# Altium PCB ILI2511_FPC_TX41RX23_20170830.PcbDoc
Units mm, origin at the board's own origin, x right, y up, seen from the top; angles counter-clockwise.
Board outline 60.1 x 74 mm, 2 copper layers (Top Layer, Bottom Layer); 3 components, 83 nets, 145 pads, 205 vias.
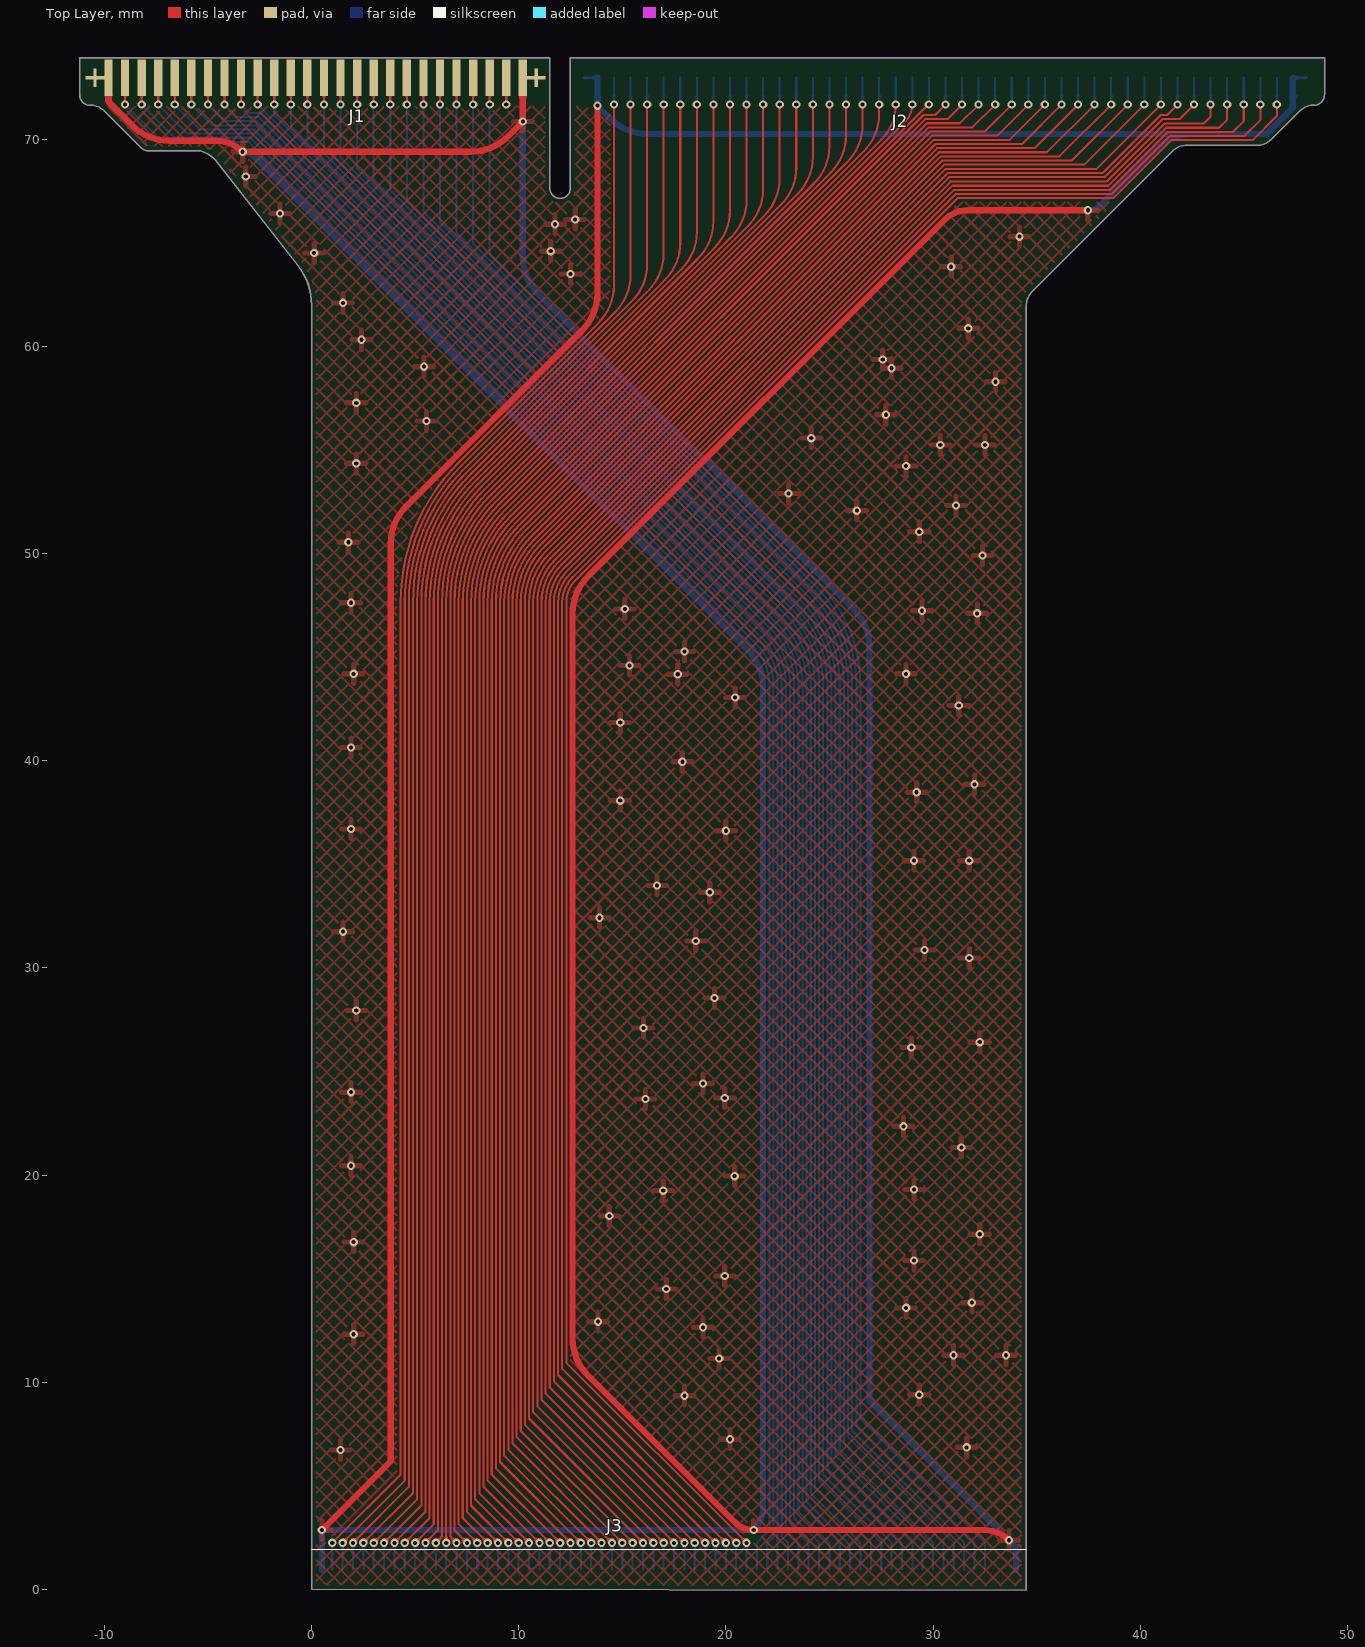
[diagram p0: Top Layer view]
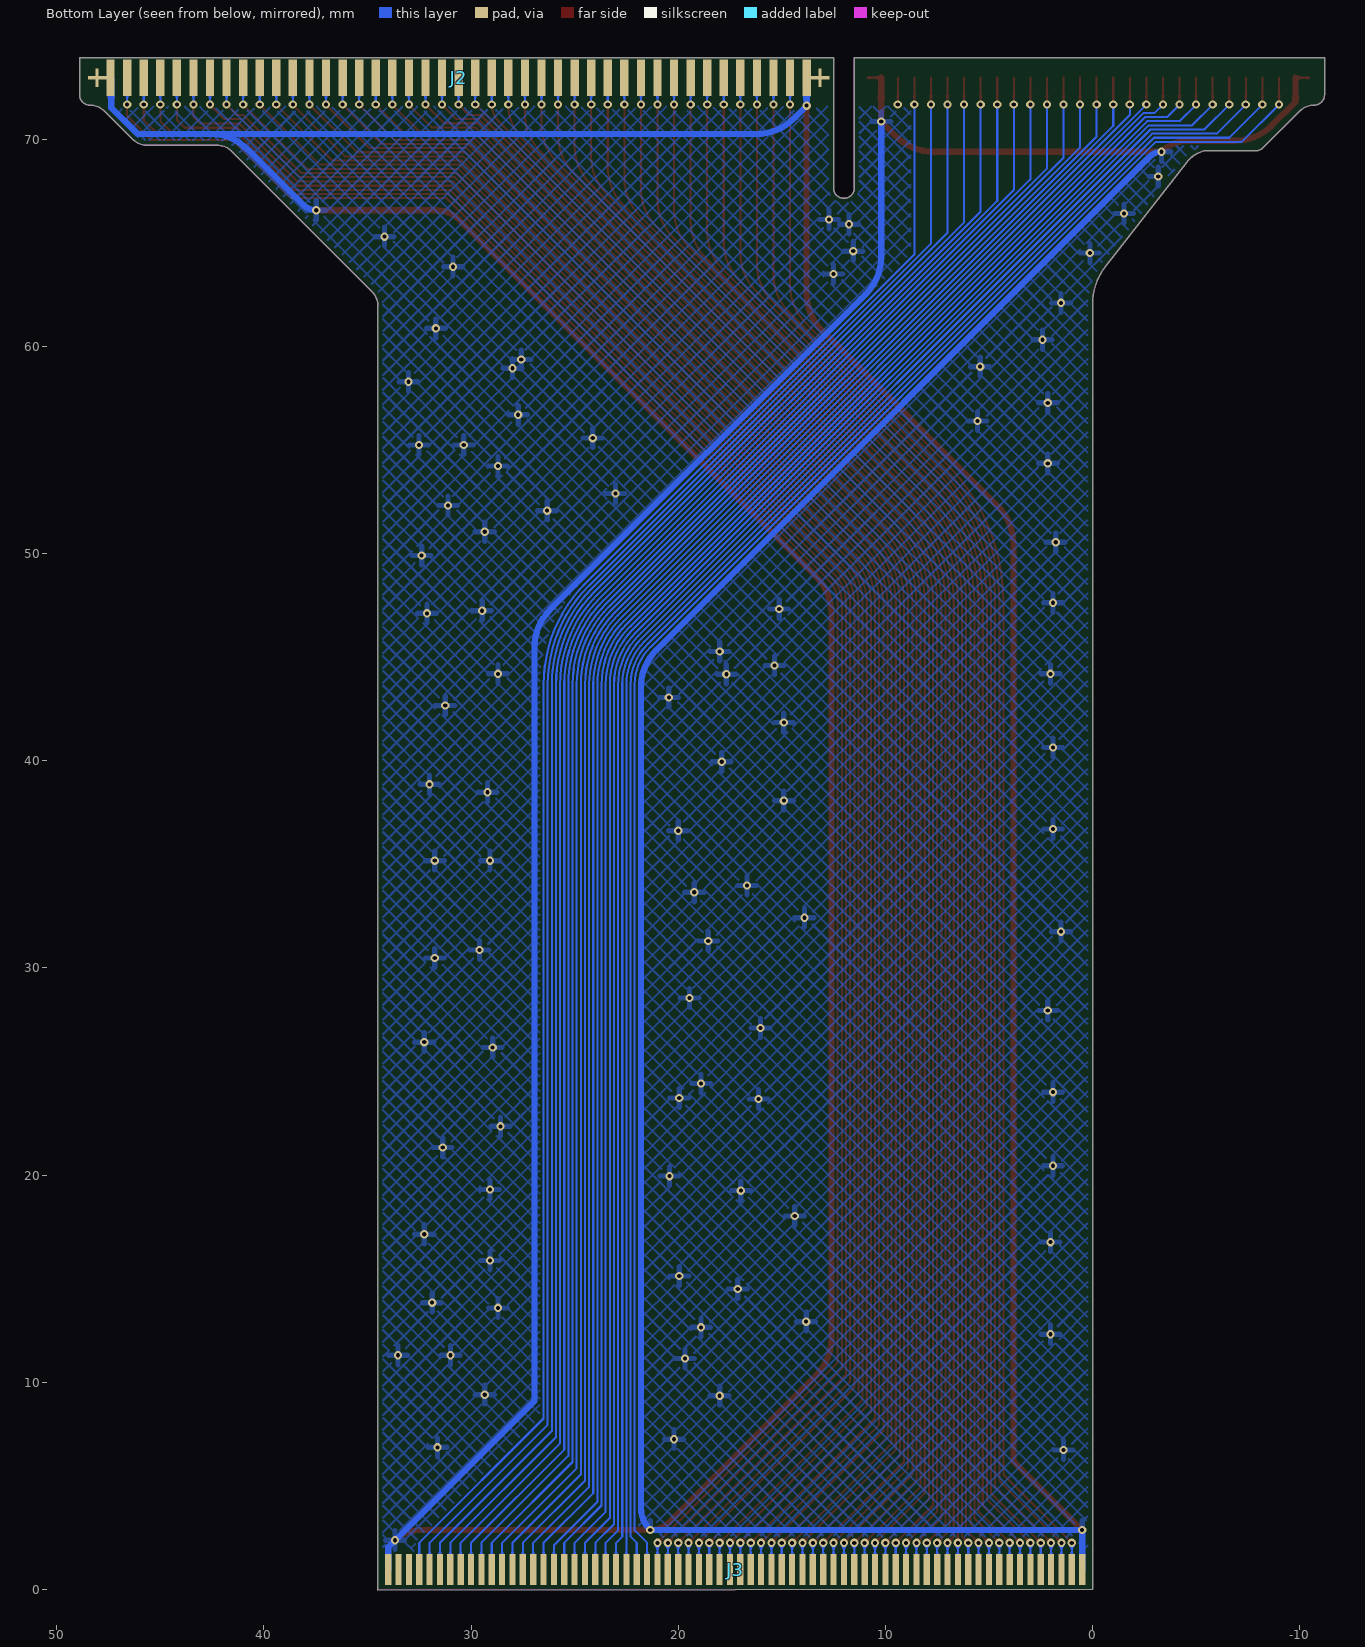
[diagram p1: Bottom Layer view, seen from below]

## Layer stack, top to bottom
Top Solder: solder mask 0.0102, Solder Resist, Dk 3.5
Top Layer: signal copper 0.0356
Dielectric 1: dielectric 0.32, FR-4, Dk 4.8
Bottom Layer: signal copper 0.0356
Bottom Solder: solder mask 0.0102, Solder Resist, Dk 3.5

## Board outline
0,0 0,62 ccw(c-3.1,62) -0.657,63.909 -4.547,68.888 ccw(c-5.762,67.967) -5.372,69.44 -7.872,69.44 cw(c-7.872,69.94) -8.225,69.587 -9.993,71.355 ccw(c-10.7,70.647) -10.7,71.647 cw(c-10.7,72.147) -11.2,72.147 -11.2,73.947 11.5,73.947 11.5,67.647 ccw(c12,67.647) 12.5,67.647 12.5,73.947 48.9,73.947 48.9,72.147 cw(c48.4,72.147) 48.4,71.647 ccw(c48.4,70.647) 47.693,71.355 46.339,70.001 cw(c45.632,70.708) 45.632,69.708 42.229,69.708 ccw(c42.229,68.784) 41.576,69.437 34.793,62.655 ccw(c35.5,61.947) 34.5,61.947 34.5,-0.053

## Design rules (kind name [scope] priority, off if disabled: settings)
Clearance Clearance_1 [InNetClass('All Nets') vs InNetClass('All Nets')] p1: gap=0.1
Clearance [OnLayer('Keep-Out Layer')] p2: gap=0.2 except(0: Arc-SMDPad Track-SMDPad)
MinimumSolderMaskSliver [All] p1: minsoldermaskwidth=0.1
PolygonConnect [All] p1: connectstyle=Relief reliefconductorwidth=0.254 reliefentries=4 polygonreliefangle="90 Angle" airgapwidth=0.254
RoutingVias [All] p1: holewidth=0.2 width=0.4 viastyle="Through Hole" minholewidth=0.2 minwidth=0.4 maxholewidth=0.711 maxwidth=1.27
SilkToSolderMaskClearance [IsPad] p1: minsilkscreentomaskgap=0 clearancetoexposedcopper=TRUE
SolderMaskExpansion [All] p1: expansion=0.102
Width [All] p1: maxlimit=0.5 minlimit=0.1 preferedwidth=0.1
28 further rules are at their usual default settings.

## Components (designator, comment, footprint, x,y, rotation, side; value= is the part's Value field where it differs from the comment)
J1 "CON-26PIN" CON_26PIN -10,72.097 r0 top
J2 "CON_43PIN" CON_43PIN 13.6,72.097 r0 top locked
J3 "CON_68PIN" CON-68PIN 0.35,0.2 r0 top locked

## Footprints (in the part's own frame and the unit in brackets; to place one, negate y for a bottom-side part, rotate by r counter-clockwise, add the part's x,y. Pads: shape width x height; smd on the part's side, far side on the other; paste and mask are expansions set on the pad)
CON-68PIN [mm]
  rect 0.3x1.5 smd far side: 1(0.15,0.75) 2(0.65,0.75) 3(1.15,0.75) 4(1.65,0.75) 5(2.15,0.75) 6(2.65,0.75) 7(3.15,0.75) 8(3.65,0.75) 9(4.15,0.75) 10(4.65,0.75) 11(5.15,0.75) 12(5.65,0.75) 13(6.15,0.75) 14(6.65,0.75) 15(7.15,0.75) 16(7.65,0.75) 17(8.15,0.75) 18(8.65,0.75) 19(9.15,0.75) 20(9.65,0.75) 21(10.15,0.75) 22(10.65,0.75) 23(11.15,0.75) 24(11.65,0.75) 25(12.15,0.75) 26(12.65,0.75) 27(13.15,0.75) 28(13.65,0.75) 29(14.15,0.75) 30(14.65,0.75) 31(15.15,0.75) 32(15.65,0.75) 33(16.15,0.75) 34(16.65,0.75) 35(17.15,0.75) 36(17.65,0.75) 37(18.15,0.75) 38(18.65,0.75) 39(19.15,0.75) 40(19.65,0.75) 41(20.15,0.75) 42(20.65,0.75) 43(21.15,0.75) 44(21.65,0.75) 45(22.15,0.75) 46(22.65,0.75) 47(23.15,0.75) 48(23.65,0.75) 49(24.15,0.75) 50(24.65,0.75) 51(25.15,0.75) 52(25.65,0.75) 53(26.15,0.75) 54(26.65,0.75) 55(27.15,0.75) 56(27.65,0.75) 57(28.15,0.75) 58(28.65,0.75) 59(29.15,0.75) 60(29.65,0.75) 61(30.15,0.75) 62(30.65,0.75) 63(31.15,0.75) 64(31.65,0.75) 65(32.15,0.75) 66(32.65,0.75) 67(33.15,0.75) 68(33.65,0.75)
CON_26PIN [mm]
  rect 0.4x1.75 smd: 1(0.2,0.875) 2(1,0.875) 3(1.8,0.875) 4(2.6,0.875) 5(3.4,0.875) 6(4.2,0.875) 7(5,0.875) 8(5.8,0.875) 9(6.6,0.875) 10(7.4,0.875) 11(8.2,0.875) 12(9,0.875) 13(9.8,0.875) 14(10.6,0.875) 15(11.4,0.875) 16(12.2,0.875) 17(13,0.875) 18(13.8,0.875) 19(14.6,0.875) 20(15.4,0.875) 21(16.2,0.875) 22(17,0.875) 23(17.8,0.875) 24(18.6,0.875) 25(19.4,0.875) 26(20.2,0.875)
CON_43PIN [mm]
  rect 0.4x1.75 smd far side: 1(0.2,0.875) 2(1,0.875) 3(1.8,0.875) 4(2.6,0.875) 5(3.4,0.875) 6(4.2,0.875) 7(5,0.875) 8(5.8,0.875) 9(6.6,0.875) 10(7.4,0.875) 11(8.2,0.875) 12(9,0.875) 13(9.8,0.875) 14(10.6,0.875) 15(11.4,0.875) 16(12.2,0.875) 17(13,0.875) 18(13.8,0.875) 19(14.6,0.875) 20(15.4,0.875) 21(16.2,0.875) 22(17,0.875) 23(17.8,0.875) 24(18.6,0.875) 25(19.4,0.875) 26(20.2,0.875) 27(21,0.875) 28(21.8,0.875) 29(22.6,0.875) 30(23.4,0.875) 31(24.2,0.875) 32(25,0.875) 33(25.8,0.875) 34(26.6,0.875) 35(27.4,0.875) 36(28.2,0.875) 37(29,0.875) 38(29.8,0.875) 39(30.6,0.875) 40(31.4,0.875) 41(32.2,0.875) 42(33,0.875) 43(33.8,0.875)

## Free pads (board coordinates)
  rect 0.9x0.15 smd: 0(-10.45,72.972) 3(10.85,72.972)
  rect 0.15x0.9 smd: 0(-10.45,72.972) 2(10.85,72.972)
  rect 0.9x0.15 smd far side: 4(13.15,72.972) 6(48.05,72.972)
  rect 0.15x0.9 smd far side: 5(13.15,72.972) 7(48.05,72.972)

## Via types
v1: diameter 0.4, hole 0.2, Top Layer to Bottom Layer, tented both sides, 205 vias

## Nets (pads, with @x,y where several pads share a name; then routed paths per layer and width w, separated by ;. In a path a pad name is that pad's centre, name@x,y a point inside that pad or via, vN(x,y) a via of type N, cw(c..) or ccw(c..) an arc to the next point about the centre after c; other vN are vias at no path point)
ESD_DUMMY: J1.1 J1.26 J2.1 J2.43 J3.1 J3.68 pad.0 pad.2 pad.3 pad.4 pad.5 pad.6 pad.7 | length 418.9
  Top Layer w0.1: pad.0@-10.45,72.972 J1.1 ; J1.26 pad.2
  Top Layer w0.3: J1.1 -9.8,71.811 -8.657,70.669 ccw(c-6.861,72.465) -6.861,69.925 -4.592,69.925 cw(c-4.592,68.133) v1(-3.325,69.4) 7.691,69.4 ccw(c7.691,71.94) 9.487,70.144 v1(10.2,70.856) J1.26 ; v1(0.5,2.863) 3.821,6.184 3.821,50.482 cw(c6.361,50.482) 4.565,52.278 13.056,60.769 ccw(c11.26,62.565) 13.8,62.565 v1(13.8,71.625) ; v1(33.666,2.374) ccw(c32.485,1.194) 32.485,2.863 v1(21.35,2.863) cw(c21.35,4.171) 20.425,3.246 13.344,10.328 cw(c15.14,12.124) 12.6,12.124 12.6,47.099 cw(c15.14,47.099) 13.344,48.895 30.564,66.114 cw(c31.676,65.003) 31.676,66.575 v1(37.475,66.575)
  Bottom Layer w0.1: pad.4 J2.1 ; J2.43 pad.6
  Bottom Layer w0.3: v1(-3.325,69.4) cw(c-3.325,68.614) -2.769,69.17 21.056,45.345 cw(c19.26,43.549) 21.8,43.549 21.8,3.951 cw(c20.263,3.951) v1(21.35,2.863) v1(0.5,2.863) J3.1 ; v1(10.2,70.856) 10.2,64.324 ccw(c12.74,64.324) 10.944,62.528 26.191,47.281 cw(c24.395,45.485) 26.935,45.485 26.935,9.105 v1(33.666,2.374) 34,2.041 J3.68 ; J2.1 v1(13.8,71.625) 14.423,71.002 ccw(c16.219,72.798) 16.219,70.258 42.577,70.258 ; v1(37.475,66.575) ccw(c37.475,67.461) 38.102,66.835 40.781,69.514 cw(c42.577,67.718) 42.577,70.258 ; 43.125,70.258 42.577,70.258 ; J2.43 47.363,72.935 47.363,71.52 46.174,70.331 46.164,70.331 46.091,70.258 42.577,70.258
  other v1: 1.397,6.731 31.623,6.858 20.2,7.25 18,9.35 29.337,9.398 19.675,11.15 30.988,11.303 33.528,11.303 2.032,12.319 18.9,12.65 13.825,12.925 28.702,13.589 31.877,13.843 17.125,14.5 19.95,15.125 29.083,15.875 2.032,16.764 32.258,17.145 14.375,18.025 16.975,19.25 29.083,19.304 20.425,19.95 1.905,20.447 31.369,21.336 28.575,22.352 16.125,23.675 19.95,23.725 1.905,24.003 18.9,24.425 28.956,26.162 32.258,26.416 16.025,27.1 2.159,27.94 19.45,28.55 31.75,30.48 29.591,30.861 18.55,31.3 1.524,31.75 13.9,32.425 19.225,33.65 16.675,33.975 29.083,35.179 31.75,35.179 20,36.625 1.905,36.703 14.9,38.075 29.21,38.481 32.004,38.862 17.9,39.95 1.905,40.64 14.9,41.85 31.242,42.672 20.45,43.05 17.675,44.175 2.032,44.196 28.702,44.196 15.35,44.6 18,45.275 32.131,47.117 29.464,47.244 15.125,47.325 1.905,47.625 32.385,49.911 1.778,50.546 29.337,51.054 26.325,52.075 31.115,52.324 23.025,52.9 28.702,54.229 2.159,54.356 30.353,55.245 32.512,55.245 24.125,55.575 5.55,56.4 27.725,56.7 2.159,57.277 33.02,58.293 28,58.95 5.425,59.025 27.575,59.375 2.413,60.325 31.7,60.875 1.524,62.103 12.5,63.5 30.875,63.85 0.127,64.516 11.55,64.6 34.175,65.3 11.75,65.9 12.725,66.125 -1.524,66.421 -3.175,68.199
RX1: J1.2 J3.43 | length 87.5
  Top Layer w0.1: v1(-9,71.675) J1.2
  Bottom Layer w0.1: v1(-9,71.675) -7.2,69.875 -3.05,69.875 21.356,45.469 cw(c19.56,43.673) 22.1,43.673 22.1,2.847 21.5,2.247 J3.43
RX2: J1.3 J3.44 | length 86.8
  Top Layer w0.1: v1(-8.2,71.675) J1.3
  Bottom Layer w0.1: v1(-8.2,71.675) -6.6,70.075 -2.967,70.075 21.497,45.61 cw(c19.56,43.673) 22.3,43.673 22.3,2.547 22,2.247 J3.44
RX3: J1.4 J3.45 | length 86.1
  Top Layer w0.1: v1(-7.4,71.675) J1.4
  Bottom Layer w0.1: v1(-7.4,71.675) -6,70.275 -2.884,70.275 21.639,45.752 cw(c19.56,43.673) 22.5,43.673 J3.45
RX4: J1.5 J3.46 | length 85.7
  Top Layer w0.1: v1(-6.6,71.675) J1.5
  Bottom Layer w0.1: v1(-6.6,71.675) -5.4,70.475 -2.801,70.475 21.78,45.893 cw(c19.56,43.673) 22.7,43.673 22.7,2.547 23,2.247 J3.46
RX5: J1.6 J3.47 | length 85.2
  Top Layer w0.1: v1(-5.8,71.675) J1.6
  Bottom Layer w0.1: v1(-5.8,71.675) -4.8,70.675 -2.719,70.675 21.922,46.035 cw(c19.56,43.673) 22.9,43.673 22.9,2.847 23.5,2.247 J3.47
RX6: J1.7 J3.48 | length 84.8
  Top Layer w0.1: v1(-5,71.675) J1.7
  Bottom Layer w0.1: v1(-5,71.675) -4.2,70.875 -2.636,70.875 22.063,46.176 cw(c19.56,43.673) 23.1,43.673 23.1,3.147 24,2.247 J3.48
RX7: J1.8 J3.49 | length 84.4
  Top Layer w0.1: v1(-4.2,71.675) J1.8
  Bottom Layer w0.1: v1(-4.2,71.675) -3.6,71.075 -2.553,71.075 22.205,46.318 cw(c19.56,43.673) 23.3,43.673 23.3,3.447 24.5,2.247 J3.49
RX8: J1.9 J3.50 | length 83.9
  Top Layer w0.1: v1(-3.4,71.675) J1.9
  Bottom Layer w0.1: v1(-3.4,71.675) -3,71.275 -2.47,71.275 22.346,46.459 cw(c19.56,43.673) 23.5,43.673 23.5,3.747 25,2.247 J3.50
RX9: J1.10 J3.51 | length 83.5
  Top Layer w0.1: v1(-2.6,71.675) J1.10
  Bottom Layer w0.1: v1(-2.6,71.675) -2.587,71.675 22.487,46.6 cw(c19.56,43.673) 23.7,43.673 23.7,4.047 25.5,2.247 J3.51
RX10: J1.11 J3.52 | length 83.4
  Top Layer w0.1: v1(-1.8,71.675) J1.11
  Bottom Layer w0.1: v1(-1.8,71.675) -1.8,71.171 22.629,46.742 cw(c19.56,43.673) 23.9,43.673 23.9,4.22 26,2.12 J3.52
RX11: J1.12 J3.53 | length 83.2
  Top Layer w0.1: v1(-1,71.675) J1.12
  Bottom Layer w0.1: v1(-1,71.675) -1,70.653 22.77,46.883 cw(c19.56,43.673) 24.1,43.673 24.1,4.647 26.5,2.247 J3.53
RX12: J1.13 J3.54 | length 83.1
  Top Layer w0.1: v1(-0.2,71.675) J1.13
  Bottom Layer w0.1: v1(-0.2,71.675) -0.2,70.136 22.912,47.025 cw(c19.56,43.673) 24.3,43.673 24.3,4.947 27,2.247 J3.54
RX13: J1.14 J3.55 | length 83
  Top Layer w0.1: v1(0.6,71.675) J1.14
  Bottom Layer w0.1: v1(0.6,71.675) 0.6,69.619 23.053,47.166 cw(c19.56,43.673) 24.5,43.673 24.5,5.247 27.5,2.247 J3.55
RX14: J1.15 J3.56 | length 82.8
  Top Layer w0.1: v1(1.4,71.675) J1.15
  Bottom Layer w0.1: v1(1.4,71.675) 1.4,69.102 23.194,47.307 cw(c19.56,43.673) 24.7,43.673 24.7,5.547 28,2.247 J3.56
RX15: J1.16 J3.57 | length 82.7
  Top Layer w0.1: v1(2.2,71.675) J1.16
  Bottom Layer w0.1: v1(2.2,71.675) 2.2,68.585 23.336,47.449 cw(c19.56,43.673) 24.9,43.673 24.9,5.847 28.5,2.247 J3.57
RX16: J1.17 J3.58 | length 82.6
  Top Layer w0.1: v1(3,71.675) J1.17
  Bottom Layer w0.1: v1(3,71.675) 3,68.068 23.477,47.59 cw(c19.56,43.673) 25.1,43.673 25.1,6.147 29,2.247 J3.58
RX17: J1.18 J3.59 | length 82.4
  Top Layer w0.1: v1(3.8,71.675) J1.18
  Bottom Layer w0.1: v1(3.8,71.675) 3.8,67.551 23.619,47.732 cw(c19.56,43.673) 25.3,43.673 25.3,6.447 29.5,2.247 J3.59
RX18: J1.19 J3.60 | length 82.3
  Top Layer w0.1: v1(4.6,71.675) J1.19
  Bottom Layer w0.1: v1(4.6,71.675) 4.6,67.033 23.76,47.873 ; 23.76,47.873 cw(c19.56,43.673) 25.5,43.673 25.5,6.747 30,2.247 J3.60
RX19: J1.20 J3.61 | length 82.2
  Top Layer w0.1: v1(5.4,71.675) J1.20
  Bottom Layer w0.1: v1(5.4,71.675) 5.4,66.516 23.902,48.015 cw(c19.56,43.673) 25.7,43.673 25.7,7.047 30.5,2.247 J3.61
RX20: J1.21 J3.62 | length 82
  Top Layer w0.1: v1(6.2,71.675) J1.21
  Bottom Layer w0.1: v1(6.2,71.675) 6.2,65.999 24.043,48.156 cw(c19.56,43.673) 25.9,43.673 25.9,7.347 31,2.247 J3.62
RX21: J1.22 J3.63 | length 81.9
  Top Layer w0.1: v1(7,71.675) J1.22
  Bottom Layer w0.1: v1(7,71.675) 7,65.482 24.184,48.297 cw(c19.56,43.673) 26.1,43.673 26.1,7.647 31.5,2.247 J3.63
RX22: J1.23 J3.64 | length 81.8
  Top Layer w0.1: v1(7.8,71.675) J1.23
  Bottom Layer w0.1: v1(7.8,71.675) 7.8,64.965 24.326,48.439 cw(c19.56,43.673) 26.3,43.673 26.3,7.947 32,2.247 J3.64
RX23: J1.24 J3.65 | length 81.6
  Top Layer w0.1: v1(8.6,71.675) J1.24
  Bottom Layer w0.1: 8.6,64.448 v1(8.6,71.675) ; 8.611,64.436 24.467,48.58 cw(c19.56,43.673) 26.5,43.673 26.5,8.247 32.5,2.247 J3.65
RX24: J1.25 | length 1.3
  Top Layer w0.1: v1(9.4,71.675) J1.25
RX25: 
RX26: 
RX27: 
RX28: 
RX29: 
RX30: 
RX31: 
RX32: 
RX33: 
RX34: 
RX35: 
RX36: 
RX37: 
RX38: 
RX39: 
RX40: 
RX41: 
TX1: J2.2 J3.2 | length 77.1
  Top Layer w0.1: v1(1,2.247) 4.3,5.547 4.3,47.65 cw(c13.809,47.65) 7.085,54.374 13.618,60.907 13.856,61.145 ccw(c12.06,62.941) 14.6,62.941 v1(14.6,71.675)
  Bottom Layer w0.1: J3.2 v1(1,2.247) ; v1(14.6,71.675) J2.2
TX2: J2.3 J3.3 | length 77.6
  Top Layer w0.1: v1(1.5,2.247) 4.5,5.247 4.5,47.65 cw(c13.809,47.65) 7.227,54.232 14.658,61.664 ; 14.453,61.459 14.656,61.662 ccw(c12.86,63.458) 14.658,61.664 ; v1(15.4,71.675) 15.4,63.458 cw(c12.86,63.458) 14.658,61.664
  Bottom Layer w0.1: J3.3 v1(1.5,2.247) ; v1(15.4,71.675) J2.3
TX3: J2.4 J3.4 | length 77.4
  Top Layer w0.1: v1(2,2.247) 4.7,4.947 4.7,47.65 cw(c13.809,47.65) 7.368,54.091 15.402,62.125 15.477,62.2 ccw(c13.731,63.946) 16.2,63.946 v1(16.2,71.675)
  Bottom Layer w0.1: J3.4 v1(2,2.247) ; v1(16.2,71.675) J2.4
TX4: J2.5 J3.5 | length 77.8
  Top Layer w0.1: v1(2.5,2.247) 4.9,4.647 4.9,47.65 cw(c13.809,47.65) 7.509,53.95 16.258,62.698 ; 16.062,62.503 16.256,62.696 ccw(c14.46,64.492) 16.258,62.698 ; v1(17,71.675) 17,64.492 cw(c14.46,64.492) 16.258,62.698
  Bottom Layer w0.1: J3.5 v1(2.5,2.247) ; v1(17,71.675) J2.5
TX5: J2.6 J3.6 | length 77.7
  Top Layer w0.1: v1(3,2.247) 5.1,4.347 5.1,47.65 cw(c13.809,47.65) 7.651,53.808 16.9,63.057 17.056,63.213 ccw(c15.26,65.009) 17.8,65.009 v1(17.8,71.675)
  Bottom Layer w0.1: J3.6 v1(3,2.247) ; v1(17.8,71.675) J2.6
TX6: J2.7 J3.7 | length 77.8
  Top Layer w0.1: v1(3.5,2.247) 5.3,4.047 5.3,47.65 cw(c13.809,47.65) 7.792,53.667 17.856,63.731 ccw(c16.06,65.527) 18.6,65.527 v1(18.6,71.675)
  Bottom Layer w0.1: J3.7 v1(3.5,2.247) ; v1(18.6,71.675) J2.7
TX7: J2.8 J3.8 | length 77.9
  Top Layer w0.1: v1(4,2.247) 5.5,3.747 5.5,47.65 cw(c13.809,47.65) 7.934,53.525 18.656,64.248 ccw(c16.86,66.044) 19.4,66.044 v1(19.4,71.675)
  Bottom Layer w0.1: J3.8 v1(4,2.247) ; v1(19.4,71.675) J2.8
TX8: J2.9 J3.9 | length 78.1
  Top Layer w0.1: v1(4.5,2.247) 5.7,3.447 5.7,47.65 cw(c13.809,47.65) 8.075,53.384 19.456,64.765 ccw(c17.66,66.561) 20.2,66.561 v1(20.2,71.675)
  Bottom Layer w0.1: J3.9 v1(4.5,2.247) ; v1(20.2,71.675) J2.9
TX9: J2.10 J3.10 | length 78.2
  Top Layer w0.1: v1(5,2.247) 5.9,3.147 5.9,47.65 cw(c13.809,47.65) 8.216,53.242 20.256,65.282 ccw(c18.46,67.078) 21,67.078 v1(21,71.675)
  Bottom Layer w0.1: J3.10 v1(5,2.247) ; v1(21,71.675) J2.10
TX10: J2.11 J3.11 | length 78.3
  Top Layer w0.1: v1(5.5,2.247) 6.1,2.847 6.1,47.65 cw(c13.809,47.65) 8.358,53.101 21.056,65.799 ccw(c19.26,67.595) 21.8,67.595 v1(21.8,71.675)
  Bottom Layer w0.1: J3.11 v1(5.5,2.247) ; v1(21.8,71.675) J2.11
TX11: J2.12 J3.12 | length 78.5
  Top Layer w0.1: v1(6,2.247) 6.227,2.475 6.227,2.476 6.256,2.505 6.256,2.51 6.268,2.522 6.268,2.529 6.277,2.539 6.277,2.548 6.286,2.556 6.286,2.567 6.292,2.573 6.292,2.585 6.296,2.59 6.296,2.604 6.299,2.607 6.299,2.622 6.3,2.623 6.3,47.65 cw(c13.809,47.65) 8.499,52.96 21.856,66.316 ccw(c20.06,68.112) 22.6,68.112 v1(22.6,71.675)
  Bottom Layer w0.1: J3.12 v1(6,2.247) ; v1(22.6,71.675) J2.12
TX12: J2.13 J3.13 | length 78.6
  Top Layer w0.1: v1(6.5,2.247) 6.5,47.65 cw(c13.809,47.65) 8.641,52.818 22.656,66.834 ccw(c20.86,68.63) 23.4,68.63 v1(23.4,71.675)
  Bottom Layer w0.1: J3.13 v1(6.5,2.247) ; v1(23.4,71.675) J2.13
TX13: J2.14 J3.14 | length 79
  Top Layer w0.1: v1(7,2.247) 6.758,2.49 6.758,2.491 6.744,2.505 6.744,2.51 6.732,2.522 6.732,2.529 6.722,2.539 6.722,2.548 6.714,2.556 6.714,2.567 6.708,2.573 6.708,2.585 6.704,2.59 6.704,2.604 6.701,2.607 6.701,2.622 6.7,2.623 6.7,47.65 cw(c13.809,47.65) 8.782,52.677 23.456,67.351 ccw(c21.66,69.147) 24.2,69.147 v1(24.2,71.675)
  Bottom Layer w0.1: J3.14 v1(7,2.247) ; v1(24.2,71.675) J2.14
TX14: J2.15 J3.15 | length 79.4
  Top Layer w0.1: v1(7.5,2.247) 6.9,2.847 6.9,47.65 cw(c13.809,47.65) 8.924,52.535 24.256,67.868 ccw(c22.46,69.664) 25,69.664 v1(25,71.675)
  Bottom Layer w0.1: J3.15 v1(7.5,2.247) ; v1(25,71.675) J2.15
TX15: J2.16 J3.16 | length 79.7
  Top Layer w0.1: v1(8,2.247) 7.1,3.147 7.1,47.65 cw(c13.809,47.65) 9.065,52.394 25.056,68.385 ccw(c23.26,70.181) 25.8,70.181 v1(25.8,71.675)
  Bottom Layer w0.1: J3.16 v1(8,2.247) ; v1(25.8,71.675) J2.16
TX16: J2.17 J3.17 | length 80.1
  Top Layer w0.1: v1(8.5,2.247) 7.3,3.447 7.3,47.65 cw(c13.809,47.65) 9.206,52.253 25.856,68.902 ccw(c24.06,70.698) 26.6,70.698 v1(26.6,71.675)
  Bottom Layer w0.1: J3.17 v1(8.5,2.247) ; v1(26.6,71.675) J2.17
TX17: J2.18 J3.18 | length 80.5
  Top Layer w0.1: v1(9,2.247) 7.5,3.747 7.5,47.65 cw(c13.809,47.65) 9.348,52.111 26.656,69.419 ccw(c24.86,71.215) 27.4,71.215 v1(27.4,71.675)
  Bottom Layer w0.1: J3.18 v1(9,2.247) ; v1(27.4,71.675) J2.18
TX18: J2.19 J3.19 | length 80.9
  Top Layer w0.1: v1(9.5,2.247) 7.7,4.047 7.7,47.65 cw(c13.809,47.65) 9.489,51.97 27.497,69.977 ccw(c25.799,71.675) v1(28.2,71.675)
  Bottom Layer w0.1: J3.19 v1(9.5,2.247) ; v1(28.2,71.675) J2.19
TX19: J2.20 J3.20 | length 81.3
  Top Layer w0.1: v1(10,2.247) 7.9,4.347 7.9,47.65 cw(c13.809,47.65) 9.631,51.828 28.662,70.86 ccw(c27.847,71.675) v1(29,71.675)
  Bottom Layer w0.1: J3.20 v1(10,2.247) ; v1(29,71.675) J2.20
TX20: J2.21 J3.21 | length 81.8
  Top Layer w0.1: v1(10.5,2.247) 8.1,4.647 8.1,47.65 cw(c13.809,47.65) 9.772,51.687 29.732,71.647 cw(c29.8,71.579) v1(29.8,71.675)
  Bottom Layer w0.1: J3.21 v1(10.5,2.247) ; v1(29.8,71.675) J2.21
TX21: J2.22 J3.22 | length 82.5
  Top Layer w0.1: v1(11,2.247) 8.3,4.947 8.3,47.65 cw(c13.809,47.65) 9.914,51.545 29.543,71.175 30.1,71.175 v1(30.6,71.675)
  Bottom Layer w0.1: J3.22 v1(11,2.247) ; v1(30.6,71.675) J2.22
TX22: J2.23 J3.23 | length 83.2
  Top Layer w0.1: v1(11.5,2.247) 8.5,5.247 8.5,47.65 cw(c13.809,47.65) 10.055,51.404 29.626,70.975 30.7,70.975 v1(31.4,71.675)
  Bottom Layer w0.1: J3.23 v1(11.5,2.247) ; v1(31.4,71.675) J2.23
TX23: J2.24 J3.24 | length 83.8
  Top Layer w0.1: v1(12,2.247) 8.7,5.547 8.7,47.65 cw(c13.809,47.65) 10.196,51.263 29.709,70.775 31.3,70.775 v1(32.2,71.675)
  Bottom Layer w0.1: J3.24 v1(12,2.247) ; v1(32.2,71.675) J2.24
TX24: J2.25 J3.25 | length 84.5
  Top Layer w0.1: v1(12.5,2.247) 8.9,5.847 8.9,47.65 cw(c13.809,47.65) 10.338,51.121 29.792,70.575 31.9,70.575 v1(33,71.675)
  Bottom Layer w0.1: J3.25 v1(12.5,2.247) ; v1(33,71.675) J2.25
TX25: J2.26 J3.26 | length 85.2
  Top Layer w0.1: v1(13,2.247) 9.1,6.147 9.1,47.65 cw(c13.809,47.65) 10.479,50.98 29.874,70.375 32.5,70.375 v1(33.8,71.675)
  Bottom Layer w0.1: J3.26 v1(13,2.247) ; v1(33.8,71.675) J2.26
TX26: J2.27 J3.27 | length 85.9
  Top Layer w0.1: v1(13.5,2.247) 9.3,6.447 9.3,47.65 cw(c13.809,47.65) 10.621,50.838 29.957,70.175 33.1,70.175 v1(34.6,71.675)
  Bottom Layer w0.1: J3.27 v1(13.5,2.247) ; v1(34.6,71.675) J2.27
TX27: J2.28 J3.28 | length 86.6
  Top Layer w0.1: v1(14,2.247) 9.5,6.747 9.5,47.65 cw(c13.809,47.65) 10.762,50.697 30.04,69.975 33.7,69.975 v1(35.4,71.675)
  Bottom Layer w0.1: J3.28 v1(14,2.247) ; v1(35.4,71.675) J2.28
TX28: J2.29 J3.29 | length 87.3
  Top Layer w0.1: v1(14.5,2.247) 9.7,7.047 9.7,47.65 cw(c13.809,47.65) 10.903,50.555 30.123,69.775 34.3,69.775 v1(36.2,71.675)
  Bottom Layer w0.1: J3.29 v1(14.5,2.247) ; v1(36.2,71.675) J2.29
TX29: J2.30 J3.30 | length 87.9
  Top Layer w0.1: v1(15,2.247) 9.9,7.347 9.9,47.65 cw(c13.809,47.65) 11.045,50.414 30.206,69.575 34.9,69.575 v1(37,71.675)
  Bottom Layer w0.1: J3.30 v1(15,2.247) ; v1(37,71.675) J2.30
TX30: J2.31 J3.31 | length 88.6
  Top Layer w0.1: v1(15.5,2.247) 10.1,7.647 10.1,47.65 cw(c13.809,47.65) 11.186,50.273 30.289,69.375 35.5,69.375 v1(37.8,71.675)
  Bottom Layer w0.1: J3.31 v1(15.5,2.247) ; v1(37.8,71.675) J2.31
TX31: J2.32 J3.32 | length 89.3
  Top Layer w0.1: v1(16,2.247) 10.3,7.947 10.3,47.65 cw(c13.809,47.65) 11.328,50.131 30.372,69.175 36.1,69.175 v1(38.6,71.675)
  Bottom Layer w0.1: J3.32 v1(16,2.247) ; v1(38.6,71.675) J2.32
TX32: J2.33 J3.33 | length 90
  Top Layer w0.1: v1(16.5,2.247) 10.5,8.247 10.5,47.65 cw(c13.809,47.65) 11.469,49.99 30.454,68.975 36.7,68.975 v1(39.4,71.675)
  Bottom Layer w0.1: J3.33 v1(16.5,2.247) ; v1(39.4,71.675) J2.33
TX33: J2.34 J3.34 | length 90.7
  Top Layer w0.1: v1(17,2.247) 10.7,8.547 10.7,47.65 cw(c13.809,47.65) 11.61,49.848 30.537,68.775 37.3,68.775 v1(40.2,71.675)
  Bottom Layer w0.1: J3.34 v1(17,2.247) ; v1(40.2,71.675) J2.34
TX34: J2.35 J3.35 | length 91.4
  Top Layer w0.1: v1(17.5,2.247) 10.9,8.847 10.9,47.65 cw(c13.809,47.65) 11.752,49.707 30.62,68.575 37.9,68.575 v1(41,71.675)
  Bottom Layer w0.1: J3.35 v1(17.5,2.247) ; v1(41,71.675) J2.35
TX35: J2.36 J3.36 | length 92
  Top Layer w0.1: v1(18,2.247) 11.1,9.147 11.1,47.65 cw(c13.809,47.65) 11.893,49.565 30.703,68.375 38.195,68.375 40.995,71.175 41.3,71.175 v1(41.8,71.675)
  Bottom Layer w0.1: J3.36 v1(18,2.247) ; v1(41.8,71.675) J2.36
TX36: J2.37 J3.37 | length 92.7
  Top Layer w0.1: v1(18.5,2.247) 11.3,9.447 11.3,47.65 cw(c13.809,47.65) 12.035,49.424 30.786,68.175 38.278,68.175 41.078,70.975 41.9,70.975 v1(42.6,71.675)
  Bottom Layer w0.1: J3.37 v1(18.5,2.247) ; v1(42.6,71.675) J2.37
TX37: J2.38 J3.38 | length 93.8
  Top Layer w0.1: v1(19,2.247) 11.5,9.747 11.5,47.65 cw(c13.809,47.65) 12.176,49.283 29.459,66.566 30.852,67.958 38.377,67.958 41.177,70.758 43.058,70.758 43.4,71.1 v1(43.4,71.675)
  Bottom Layer w0.1: J3.38 v1(19,2.247) ; v1(43.4,71.675) J2.38
TX38: J2.39 J3.39 | length 94.5
  Top Layer w0.1: v1(19.5,2.247) 11.7,10.047 11.7,47.65 cw(c13.809,47.65) 12.318,49.141 30.935,67.758 38.46,67.758 41.26,70.558 43.808,70.558 44.2,70.95 v1(44.2,71.675)
  Bottom Layer w0.1: J3.39 v1(19.5,2.247) ; v1(44.2,71.675) J2.39
TX39: J2.40 J3.40 | length 95.3
  Top Layer w0.1: v1(20,2.247) 11.9,10.347 11.9,47.65 cw(c13.809,47.65) 12.459,49 31.018,67.558 38.543,67.558 41.343,70.358 44.483,70.358 45,70.875 v1(45,71.675)
  Bottom Layer w0.1: J3.40 v1(20,2.247) ; v1(45,71.675) J2.40
TX40: J2.41 J3.41 | length 95.9
  Top Layer w0.1: v1(20.5,2.247) 12.1,10.647 12.1,47.65 cw(c13.809,47.65) 12.6,48.858 31.101,67.358 38.626,67.358 41.425,70.158 45.033,70.158 45.8,70.925 v1(45.8,71.675)
  Bottom Layer w0.1: J3.41 v1(20.5,2.247) ; v1(45.8,71.675) J2.41
TX41: J2.42 J3.42 | length 96.5
  Top Layer w0.1: v1(21,2.247) 12.3,10.947 12.3,47.65 cw(c13.809,47.65) 12.742,48.717 31.183,67.158 38.708,67.158 41.508,69.958 45.433,69.958 46.6,71.125 v1(46.6,71.675)
  Bottom Layer w0.1: J3.42 v1(21,2.247) ; v1(46.6,71.675) J2.42
pads on no net: J3.66 J3.67

## Polygon pours and split planes (outlines as drawn)
ESD_DUMMY on Top Layer "top" (hatched 45Degree grid 0.5 track 0.1, remove dead copper, pour order 4): -12.25,75.65 50.125,75.65 50.125,-2.825 -12.1,-2.825
ESD_DUMMY on Bottom Layer "top" (hatched 45Degree grid 0.5 track 0.1, remove dead copper, pour order 6): -12.25,75.65 50.125,75.65 50.125,-2.825 -12.1,-2.825

## Keep-outs
Keep-Out Layer:
  the board outline again, w0

## Other copper
Top Layer:
  pour cut-out: -11.2,73.947 48.9,73.947 48.9,71.575 -11.2,71.575 -11.2,71.6
Bottom Layer:
  pour cut-out: -11.2,73.947 48.9,73.947 48.9,71.575 -11.2,71.575 -11.2,71.6

## Silkscreen, mask and mechanical layers (free items; w line width, h text height)
Top Overlay:
  lines w0: 0,1.947 34.5,1.947